# EAGLE board rotary_breakout (EAGLE 9.2.1)
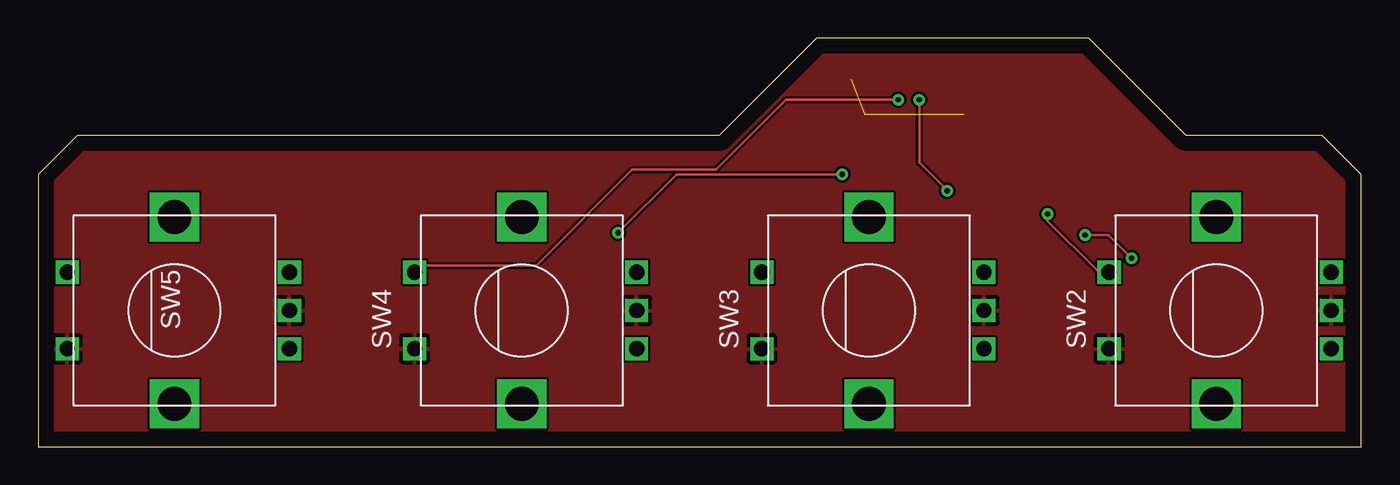
[diagram p0: board, top side]
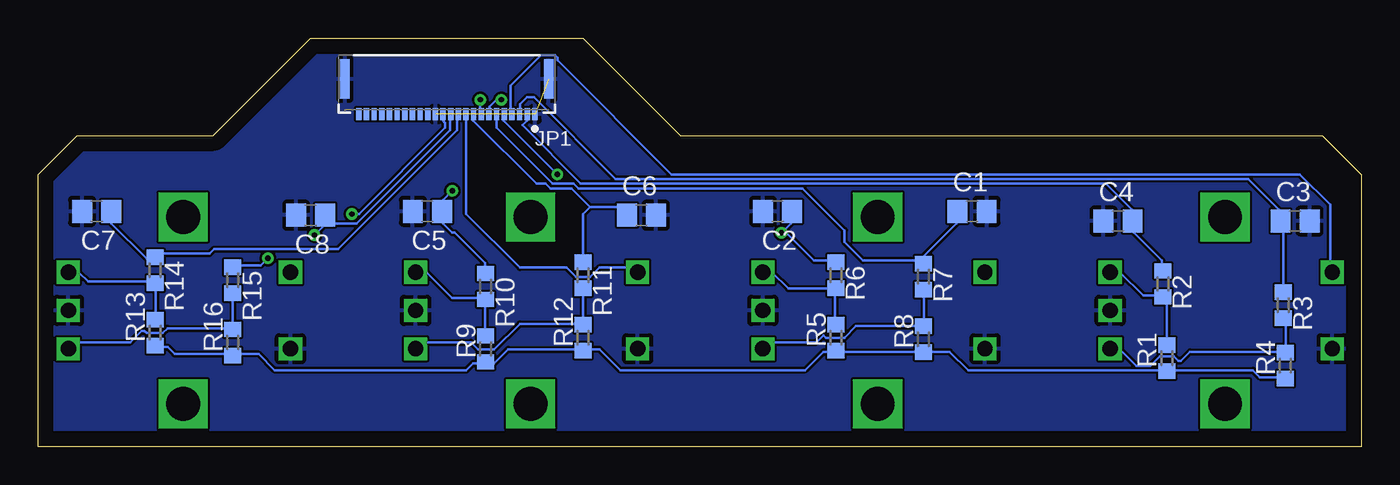
[diagram p1: board, bottom side, seen from below]

Size 86.36 x 26.67 mm. Coordinates in mm from the lower left corner, seen from the top.
Outline: 0,0 86.36,0 86.36,17.78 83.82,20.32 74.93,20.32 68.58,26.67 50.8,26.67 44.45,20.32 2.54,20.32 0,17.78 0,0
Copper layers (1*16): Top 0.035mm / dielectric 1.5mm / Bottom 0.035mm
Design rules "default": minimum track width 6mil, minimum drill 0.35mm, track to track 6mil, track to pad 6mil, pad to pad 6mil, via to via 6mil, smd to smd 6mil, copper to edge 40mil, drill to drill 6mil, minimum pad ring 10mil, minimum via ring 8mil, stop-mask expansion 4mil, vias tented up to drill 0mil, thermal gap 10mil
Net classes: 1 PWR: width 0.457 mm, clearance 0.203 mm

## Footprints (pad centres in the part's own frame; a part is rotated, then mirrored left to right if it is on the bottom)
C0805 = smd 1.3 x 1.5: 1 -0.95,0; 2 0.95,0
MOLEX_51281-2494_0 = smd 0.35 x 0.8: 1 -5.75,1.15; 2 -5.25,1.15; 3 -4.75,1.15; 4 -4.25,1.15; 5 -3.75,1.15; 6 -3.25,1.15; 7 -2.75,1.15; 8 -2.25,1.15; 9 -1.75,1.15; 10 -1.25,1.15; 11 -0.75,1.15; 12 -0.25,1.15; 13 0.25,1.15; 14 0.75,1.15; 15 1.25,1.15; 16 1.75,1.15; 17 2.25,1.15; 18 2.75,1.15; 19 3.25,1.15; 20 3.75,1.15; 21 4.25,1.15; 22 4.75,1.15; 23 5.25,1.15; 24 5.75,1.15 | smd 0.6 x 2.6: MP1 -6.65,-1.15; MP2 6.65,-1.15
R0603 = smd 1 x 1.1: 1 -0.85,0; 2 0.85,0
SWITCH-ALPS_ALPS_EC12E_SW = drill 1 square: A -2.5,-7.5; B 2.5,-7.5; C 0,-7.5; D -2.5,7; E 2.5,7 | drill 2.2 square: GND1 -6.1,0; GND2 6.1,0

## Placement (x,y rotation side)
C1  [C0805]  25.4,15.37 0 bottom
C2  [C0805]  38.1,15.37 180 bottom
C3  [C0805]  4.32,14.73 0 bottom
C4  [C0805]  15.88,14.73 0 bottom
C5  [C0805]  60.96,15.37 180 bottom
C6  [C0805]  46.99,15.11 0 bottom
C7  [C0805]  82.55,15.37 180 bottom
C8  [C0805]  68.58,15.11 180 bottom
JP1  MOLEX_51281-2494MOLEX_51281-2494_0_0  [MOLEX_51281-2494_0]  59.69,22.86 180 bottom
R1  10k  [R0603]  12.7,5.78 90 bottom
R2  10k  [R0603]  12.95,10.62 270 bottom
R3  10k  [R0603]  5.08,9.23 270 bottom
R4  10k  [R0603]  4.95,5.28 90 bottom
R5  10k  [R0603]  34.29,7.12 90 bottom
R6  10k  [R0603]  34.29,11.19 270 bottom
R7  10k  [R0603]  28.57,11.09 270 bottom
R8  10k  [R0603]  28.57,7.01 90 bottom
R9  10k  [R0603]  57.15,6.38 90 bottom
R10  10k  [R0603]  57.15,10.45 270 bottom
R11  10k  [R0603]  50.8,11.19 270 bottom
R12  10k  [R0603]  50.8,7.12 90 bottom
R13  10k  [R0603]  78.74,7.44 90 bottom
R14  10k  [R0603]  78.74,11.51 270 bottom
R15  10k  [R0603]  73.66,10.87 270 bottom
R16  10k  [R0603]  73.66,6.8 90 bottom
SW2  SWITCH-ALPS_EC12E_SW  [SWITCH-ALPS_ALPS_EC12E_SW]  76.9,8.89 90 top
SW3  SWITCH-ALPS_EC12E_SW  [SWITCH-ALPS_ALPS_EC12E_SW]  54.23,8.89 90 top
SW4  SWITCH-ALPS_EC12E_SW  [SWITCH-ALPS_ALPS_EC12E_SW]  31.56,8.89 90 top
SW5  SWITCH-ALPS_EC12E_SW  [SWITCH-ALPS_ALPS_EC12E_SW]  8.89,8.89 90 top

## Library data of the parts
C1-C8 R1-R16 = resistor-nick
JP1 = Molex - 51281-2494; CIIVA_IDS: 3405321; CIRCUITS_LOADED: 24; COMPONENT_LINK_1_DESCRIPTION: Manufacturer URL; COMPONENT_LINK_1_URL: http://www.molex.com/molex/index.jsp; COMPONENT_LINK_3_DESCRIPTION: Package Specification; COMPONENT_LINK_3_URL: http://www.molex.com/pdm_docs/sd/512812494_sd.pdf; CONTACT_POSITION: Dual; CURRENT_MAX_PER_CONTACT: 0.5A; DATASHEET: http://www.molex.com/webdocs/datasheets/pdf/en-us/0512812494_FFC_FPC_CONNECTORS.pdf; DURABILITY_MATING_CYCLES_MAX: 20; ENTRY_ANGLE: 90degrees Angle; FOOTPRINT_VARIANT_NAME_0: Manufacturer Recommended; IMPORTED: yes; IMPORTED_FROM: vault; IMPORT_TS: 1521850954; MATED_HEIGHT: 1.20mm; MATERIAL___METAL: Phosphor Bronze; MATERIAL___PLATING_MATING: Gold; MATERIAL___PLATING_TERMINATION: Tin; MF: Molex; MOUNTING_TECHNOLOGY: Surface Mount; MPN: 51281-2494; NUMBER_OF_ROWS: 1; ORIENTATION: Right Angle; PACKAGE: 51281-2494; PACKAGE_DESCRIPTION: 24-Lead FPC Connector, Pitch 0.5 mm; PACKAGE_VERSION: Rev. J, 10/2010; PACKING: Tape and Reel; PCB_LOCATOR: No; PCB_RETENTION: Yes; PITCH___MATING_INTERFACE: 0.50mm; POLARIZED_TO_PCB: Yes; PREFIX: J; RELEASE_DATE: 1411372362; ROHS: Yes; STACKABLE: No; VAULT_GUID: 2A86E2F5-7AAB-4DF7-B6C7-A32DC9881D20; VAULT_REVISION: 5B9E9500-2FB9-49B8-84B2-D92C7FEE26D0; VOLTAGE_MAX: 50V
SW2-SW5 = interface; MPN: EC12E2424407; OC_FARNELL: 1520813; OC_NEWARK: 74M1068

## Nets
ENC1_A: C4.2 JP1.2 R2.1
ENC1_B: C3.1 JP1.3 R3.1
ENC1_SW: JP1.4 SW5.E
ENC2_A: C2.1 JP1.5 R6.1
ENC2_B: C1.1 JP1.6 R7.1
ENC2_SW: JP1.7 SW4.E
ENC3_A: C5.1 JP1.8 R10.1
ENC3_B: C6.1 JP1.9 R11.1
ENC3_SW: JP1.10 SW3.E
ENC4_A: C7.1 JP1.11 R14.1
ENC4_B: C8.1 JP1.12 R15.1
ENC4_SW: JP1.13 SW2.E
GND: C1.2 C2.2 C3.2 C4.1 C5.2 C6.2 C7.2 C8.2 JP1.1 JP1.14 JP1.MP1 JP1.MP2 SW2.C SW2.D SW3.C SW3.D SW4.C SW4.D SW5.C SW5.D
N$1: R1.2 R2.2 SW5.B
N$2: R5.2 R6.2 SW4.B
N$3: R9.2 R10.2 SW3.B
N$4: R13.2 R14.2 SW2.B
N$5: R7.2 R8.2 SW4.A
N$6: R11.2 R12.2 SW3.A
N$7: R15.2 R16.2 SW2.A
N$8: R3.2 R4.2 SW5.A
VCC: R1.1 R4.1 R5.1 R8.1 R9.1 R12.1 R13.1 R16.1

## Tracks (layer width: path | path; a pad name or v marks a point on that pad's centre or on a via)
ENC1_A
  Bottom 0.152: JP1.2 54.46,21.59 54.46,21.29 54.76,20.98 50.95,17.17 16.66,17.17 14.99,15.49 14.99,14.73 C4.2 14.83,14.73 14.83,13.97 13.01,12.14 13.01,11.53 R2.1
ENC1_B
  Bottom 0.152: JP1.3 54.91,21.74 54.91,22.35 54.46,22.81 54,22.81 48.67,17.47 7.37,17.47 5.39,15.49 5.39,14.73 C3.1 5.23,14.73 5.08,14.58 R3.1
ENC1_SW
  Bottom 0.152: JP1.4 55.52,21.74 55.52,23.57 53.54,25.55 52.63,25.55 52.48,25.4 52.48,25.25 45.01,17.78 4.01,17.78 2.03,15.8 2.03,11.53 SW5.E
ENC2_A  (via drill 0.35)
  Top 0.152: v52.48,17.78 41.66,17.78 v37.85,13.97
  Bottom 0.152: v52.48,17.78 55.98,21.29 55.98,21.59 JP1.5 | 37.69,14.12 37.24,14.58 37.24,15.34 C2.1 | 37.69,14.12 35.71,12.14 34.34,12.14 R6.1 | 37.69,14.12 v37.85,13.97
ENC2_B
  Bottom 0.152: 28.85,12.14 32.51,12.14 33.73,13.36 33.73,14.12 36.47,16.87 51.11,16.87 51.41,17.17 52.78,17.17 56.44,20.83 56.44,21.59 JP1.6 | 28.85,12.14 28.7,11.99 R7.1 28.85,12.14 | 28.85,12.14 26.42,14.58 26.42,15.34 C1.1
ENC2_SW  (via drill 0.35)
  Top 0.152: v56.13,22.66 48.82,22.66 44.25,18.09 38.76,18.09 32.51,11.84 24.89,11.84 24.59,11.53 SW4.E
  Bottom 0.152: v56.13,22.66 56.44,22.66 56.9,22.2 56.9,21.74 JP1.7
ENC3_A  (via drill 0.35)
  Top 0.152: v57.51,22.66 57.51,18.54 v59.33,16.71
  Bottom 0.152: v57.51,22.66 57.51,21.74 JP1.8 | v59.33,16.71 59.94,16.1 59.94,15.49 C5.1 59.94,15.34 59.94,14.58 59.33,13.97 59.18,13.97 57.2,11.99 57.2,11.38 R10.1
ENC3_B
  Bottom 0.152: 50.34,15.65 51.56,16.87 52.93,16.87 53.24,17.17 53.85,17.17 57.96,21.29 57.96,21.59 JP1.9 | 50.34,15.65 48.51,15.65 48.06,15.19 C6.1 | R11.1 50.8,15.19 50.34,15.65
ENC3_SW
  Bottom 0.152: JP1.10 58.42,21.59 58.42,15.19 54.91,11.68 51.87,11.68 51.26,11.07 50.34,11.07 49.73,11.68 47.45,11.68 47.3,11.53 SW3.E
ENC4_A
  Bottom 0.152: JP1.11 59.03,21.59 59.03,20.68 66.8,12.9 74.88,12.9 75.18,12.6 78.54,12.6 78.69,12.45 R14.1 78.84,12.29 79.3,12.29 81.58,14.58 81.58,15.34 C7.1
ENC4_B  (via drill 0.35)
  Top 0.152: v71.37,12.29 69.85,13.82 v68.33,13.82
  Bottom 0.152: 67.26,14.73 67.56,15.04 C8.1 67.26,14.73 | 67.26,14.73 67.11,14.58 65.58,14.58 59.49,20.68 59.49,21.59 JP1.12 | v71.37,12.29 71.83,11.84 73.66,11.84 R15.1 | v68.33,13.82 67.41,14.73 67.26,14.73
ENC4_SW  (via drill 0.35)
  Top 0.152: v65.89,15.19 65.89,14.73 69.09,11.53 69.85,11.53 SW2.E
  Bottom 0.152: v65.89,15.19 65.43,15.19 59.79,20.83 59.79,21.13 59.94,21.29 59.94,21.59 JP1.13
GND  (2 unrouted)
  pour Top: -22.86,27.94 186.69,27.94 203.2,11.43 203.2,1.27 171.45,-30.48 19.05,-30.48 -31.12,19.68
  pour Bottom: -34.92,15.88 -19.05,31.75 186.69,31.75 210.82,7.62 210.82,0 177.8,-33.02 13.97,-33.02
N$1
  Bottom 0.152: R1.2 12.7,9.55 12.85,9.7 R2.2 13.01,9.86 14.22,9.86 15.75,11.38 16.36,11.38 SW5.B
N$2
  Bottom 0.152: 34.34,10.31 34.34,8.03 R5.2 | 34.34,10.31 37.39,10.31 38.46,11.38 38.91,11.38 SW4.B | 34.34,10.31 R6.2
N$3
  Bottom 0.152: R9.2 57.2,7.26 57.2,9.55 R10.2 57.2,9.7 59.33,9.7 61.01,11.38 61.62,11.38 SW3.B
N$4
  Bottom 0.152: R13.2 78.69,8.33 78.69,10.62 R14.2 78.84,10.77 83.11,10.77 83.72,11.38 84.33,11.38 SW2.B
N$5
  Bottom 0.152: R7.2 28.55,10.16 28.55,7.87 R8.2 28.7,7.87 32.97,7.87 33.73,7.11 34.95,7.11 35.1,7.26 35.56,6.81 38.61,6.81 38.91,6.5 SW4.A
N$6
  Bottom 0.152: R11.2 50.8,8.03 | 50.8,8.03 54.91,8.03 56.59,6.35 57.66,6.35 58.12,6.81 61.32,6.81 61.62,6.5 SW3.A | 50.8,8.03 R12.2
N$7
  Bottom 0.152: R15.2 73.66,7.72 | 73.66,7.72 77.93,7.72 78.23,7.42 79.3,7.42 79.45,7.57 79.6,7.57 80.37,6.81 84.02,6.81 84.33,6.5 SW2.A | 73.66,7.72 R16.2
N$8
  Bottom 0.152: R3.2 5.08,8.33 4.93,8.18 4.93,6.2 R4.2 5.08,6.2 11.18,6.2 11.79,5.59 11.94,5.59 12.24,5.89 13.16,5.89 13.77,5.28 14.68,5.28 15.75,6.35 16.36,6.35 SW5.A
VCC
  Bottom 0.152: 73.66,6.05 77.47,6.05 77.93,6.5 78.69,6.5 R13.1 | 50.8,6.35 55.68,6.35 56.59,5.44 57.05,5.44 R9.1 57.2,5.44 57.96,5.44 58.42,4.98 70.92,4.98 71.98,6.05 73.66,6.05 | 73.66,6.05 R16.1 | 12.7,4.98 7.06,4.98 6.6,4.52 5.08,4.52 R4.1 | 12.7,4.98 25.65,4.98 26.87,6.2 28.55,6.2 R8.1 28.7,6.2 34.19,6.2 R5.1 34.34,6.2 35.1,6.2 36.32,4.98 48.36,4.98 49.73,6.35 50.8,6.35 | 12.7,4.98 R1.1 | 50.8,6.35 R12.1